# EAGLE board TSSOP38 Breakout Board (EAGLE 9.1.3)
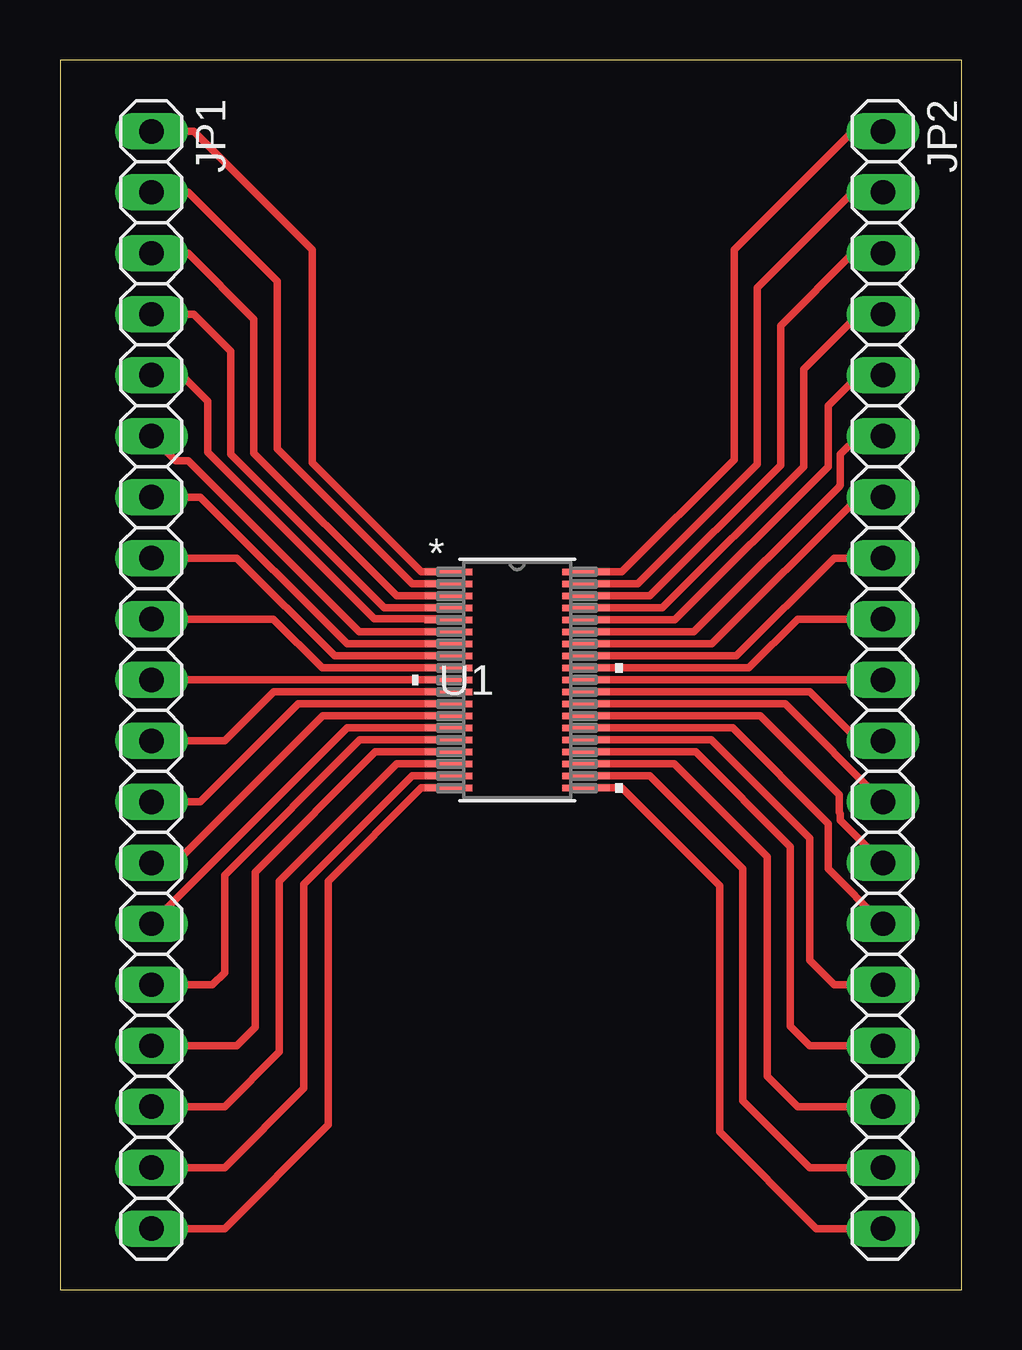
[diagram p0: board, top side]

Size 37.57 x 51.23 mm. Coordinates in mm from the lower left corner, seen from the top.
Outline: 0,0 37.57,0 37.57,51.23 0,51.23 0,0
Copper layers (1*16): Top 0.035mm / dielectric 1.5mm / Bottom 0.035mm
Design rules "default": minimum track width 6mil, minimum drill 0.35mm, track to track 6mil, track to pad 6mil, pad to pad 6mil, via to via 6mil, smd to smd 6mil, copper to edge 40mil, drill to drill 6mil, minimum pad ring 10mil, minimum via ring 8mil, stop-mask expansion 4mil, vias tented up to drill 0mil, thermal gap 10mil
Net classes: 0 default: width 0.305 mm, clearance 0.152 mm

## Footprints (pad centres in the part's own frame; a part is rotated, then mirrored left to right if it is on the bottom)
1X19 = drill 1.016 long: 1 -22.86,0; 2 -20.32,0; 3 -17.78,0; 4 -15.24,0; 5 -12.7,0; 6 -10.16,0; 7 -7.62,0; 8 -5.08,0; 9 -2.54,0; 10 0,0; 11 2.54,0; 12 5.08,0; 13 7.62,0; 14 10.16,0; 15 12.7,0; 16 15.24,0; 17 17.78,0; 18 20.32,0; 19 22.86,0
DBT38-M = smd 1.981 x 0.279: 1 -2.87,4.5; 2 -2.87,4; 3 -2.87,3.5; 4 -2.87,3; 5 -2.87,2.5; 6 -2.87,2; 7 -2.87,1.5; 8 -2.87,1; 9 -2.87,0.5; 10 -2.87,0; 11 -2.87,-0.5; 12 -2.87,-1; 13 -2.87,-1.5; 14 -2.87,-2; 15 -2.87,-2.5; 16 -2.87,-3; 17 -2.87,-3.5; 18 -2.87,-4; 19 -2.87,-4.5; 20 2.87,-4.5; 21 2.87,-4; 22 2.87,-3.5; 23 2.87,-3; 24 2.87,-2.5; 25 2.87,-2; 26 2.87,-1.5; 27 2.87,-1; 28 2.87,-0.5; 29 2.87,0; 30 2.87,0.5; 31 2.87,1; 32 2.87,1.5; 33 2.87,2; 34 2.87,2.5; 35 2.87,3; 36 2.87,3.5; 37 2.87,4; 38 2.87,4.5

## Placement (x,y rotation side)
JP1  [1X19]  3.81,25.4 270 top
JP2  [1X19]  34.29,25.4 270 top
U1  ADS7952SDBTDBT38-M  [DBT38-M]  19.05,25.4 0 top

## Library data of the parts
JP1 JP2 = pinhead
U1 = ADS7952; MANUFACTURER_PART_NUMBER: ADS7952SDBT; VENDOR: Texas Instruments

## Nets
N$1: JP1.1 U1.1
N$2: JP1.2 U1.2
N$3: JP1.3 U1.3
N$4: JP1.4 U1.4
N$5: JP1.5 U1.5
N$6: JP1.6 U1.6
N$7: JP1.7 U1.7
N$8: JP1.8 U1.8
N$9: JP1.19 U1.19
N$10: JP1.18 U1.18
N$11: JP1.17 U1.17
N$12: JP1.16 U1.16
N$13: JP1.15 U1.15
N$14: JP1.14 U1.14
N$15: JP1.13 U1.13
N$16: JP1.12 U1.12
N$17: JP1.11 U1.11
N$18: JP1.10 U1.10
N$19: JP1.9 U1.9
N$20: JP2.1 U1.38
N$21: JP2.2 U1.37
N$22: JP2.3 U1.36
N$23: JP2.4 U1.35
N$24: JP2.5 U1.34
N$25: JP2.6 U1.33
N$26: JP2.7 U1.32
N$27: JP2.8 U1.31
N$28: JP2.9 U1.30
N$29: JP2.10 U1.29
N$30: JP2.11 U1.28
N$31: JP2.12 U1.27
N$32: JP2.13 U1.26
N$33: JP2.14 U1.25
N$34: JP2.15 U1.24
N$35: JP2.16 U1.23
N$36: JP2.17 U1.22
N$37: JP2.18 U1.21
N$38: JP2.19 U1.20

## Tracks (layer width: path | path; a pad name or v marks a point on that pad's centre or on a via)
N$1
  Top 0.305: U1.1 15.06,29.9 10.52,34.44 10.52,43.32 5.57,48.26 JP1.1
N$2
  Top 0.305: 16.12,29.46 U1.2 14.68,29.4 9.04,35.04 9.04,42.01 5.33,45.72 JP1.2
N$3
  Top 0.305: U1.3 14.03,28.9 8.08,34.85 8.08,40.44 5.33,43.18 JP1.3
N$4
  Top 0.305: 16.12,28.46 U1.4 13.51,28.4 7.11,34.8 7.11,39.1 5.57,40.64 JP1.4
N$5
  Top 0.305: U1.5 16.14,27.94 13.09,27.94 6.15,34.89 6.15,37.02 5.06,38.1 JP1.5
N$6
  Top 0.305: U1.6 12.48,27.4 5.33,34.54 4.83,34.54 JP1.6
N$7
  Top 0.305: U1.7 11.96,26.9 5.84,33.02 JP1.7
N$8
  Top 0.305: U1.8 11.45,26.4 7.37,30.48 JP1.8
N$9
  Top 0.305: U1.19 15.06,20.9 11.18,17.02 11.18,6.86 6.86,2.54 JP1.19
N$10
  Top 0.305: U1.18 14.68,21.4 10.16,16.88 10.16,8.38 6.86,5.08 JP1.18
N$11
  Top 0.305: U1.17 14.03,21.9 9.14,17.02 9.14,9.91 6.86,7.62 JP1.17
N$12
  Top 0.305: U1.16 13.14,22.4 8.13,17.39 8.13,10.92 7.37,10.16 JP1.16
N$13
  Top 0.305: U1.15 12.49,22.9 6.86,17.27 6.86,13.21 6.35,12.7 JP1.15
N$14
  Top 0.305: U1.14 11.97,23.4 JP1.14
N$15
  Top 0.305: U1.13 10.95,23.9 4.83,17.78 JP1.13
N$16
  Top 0.305: U1.12 9.92,24.4 5.84,20.32 JP1.12
N$17
  Top 0.305: U1.11 8.9,24.9 6.86,22.86 JP1.11
N$18
  Top 0.305: U1.10 JP1.10
N$19
  Top 0.305: U1.9 10.93,25.9 8.89,27.94 JP1.9
N$20
  Top 0.305: U1.38 23.41,29.9 28.09,34.58 28.09,43.32 33.03,48.26 JP2.1
N$21
  Top 0.305: U1.37 24.07,29.4 29.06,34.39 29.06,41.74 33.03,45.72 JP2.2
N$22
  Top 0.305: U1.36 24.58,28.9 30.02,34.34 30.02,40.17 33.03,43.18 JP2.3
N$23
  Top 0.305: U1.35 25.1,28.4 30.99,34.29 30.99,38.35 33.27,40.64 JP2.4
N$24
  Top 0.305: U1.34 25.61,27.9 32,34.29 32,36.83 33.27,38.1 JP2.5
N$25
  Top 0.305: U1.33 26.42,27.4 | 26.42,27.4 | 26.42,27.4 32.46,33.45 32.46,33.46 32.51,33.51 32.51,34.8 33.27,35.56 JP2.6
N$26
  Top 0.305: U1.32 27.15,26.9 33.27,33.02 JP2.7
N$27
  Top 0.305: U1.31 28.18,26.4 32.26,30.48 JP2.8
N$28
  Top 0.305: U1.30 28.69,25.9 30.73,27.94 JP2.9
N$29
  Top 0.305: U1.29 JP2.10
N$30
  Top 0.305: U1.28 31.23,24.9 33.27,22.86 JP2.11
N$31
  Top 0.305: U1.27 30.21,24.4 JP2.12
N$32
  Top 0.305: U1.26 29.19,23.9 32.46,20.62 32.46,19.88 32.51,19.83 32.51,19.56 JP2.13
N$33
  Top 0.305: JP2.14 32,17.53 32,19.42 28.02,23.4 U1.25
N$34
  Top 0.305: U1.24 27.14,22.9 31.24,18.8 31.24,13.72 32.26,12.7 JP2.15
N$35
  Top 0.305: U1.23 26.48,22.4 30.43,18.45 30.43,10.97 31.24,10.16 JP2.16
N$36
  Top 0.305: U1.22 25.6,21.9 29.46,18.03 29.46,8.89 30.73,7.62 JP2.17
N$37
  Top 0.305: U1.21 24.57,21.4 28.45,17.53 28.45,7.87 31.24,5.08 JP2.18
N$38
  Top 0.305: U1.20 23.41,20.9 27.48,16.83 27.48,6.57 31.51,2.54 JP2.19